# EAGLE board Arduino 40hz audio and led (EAGLE 9.2.2)
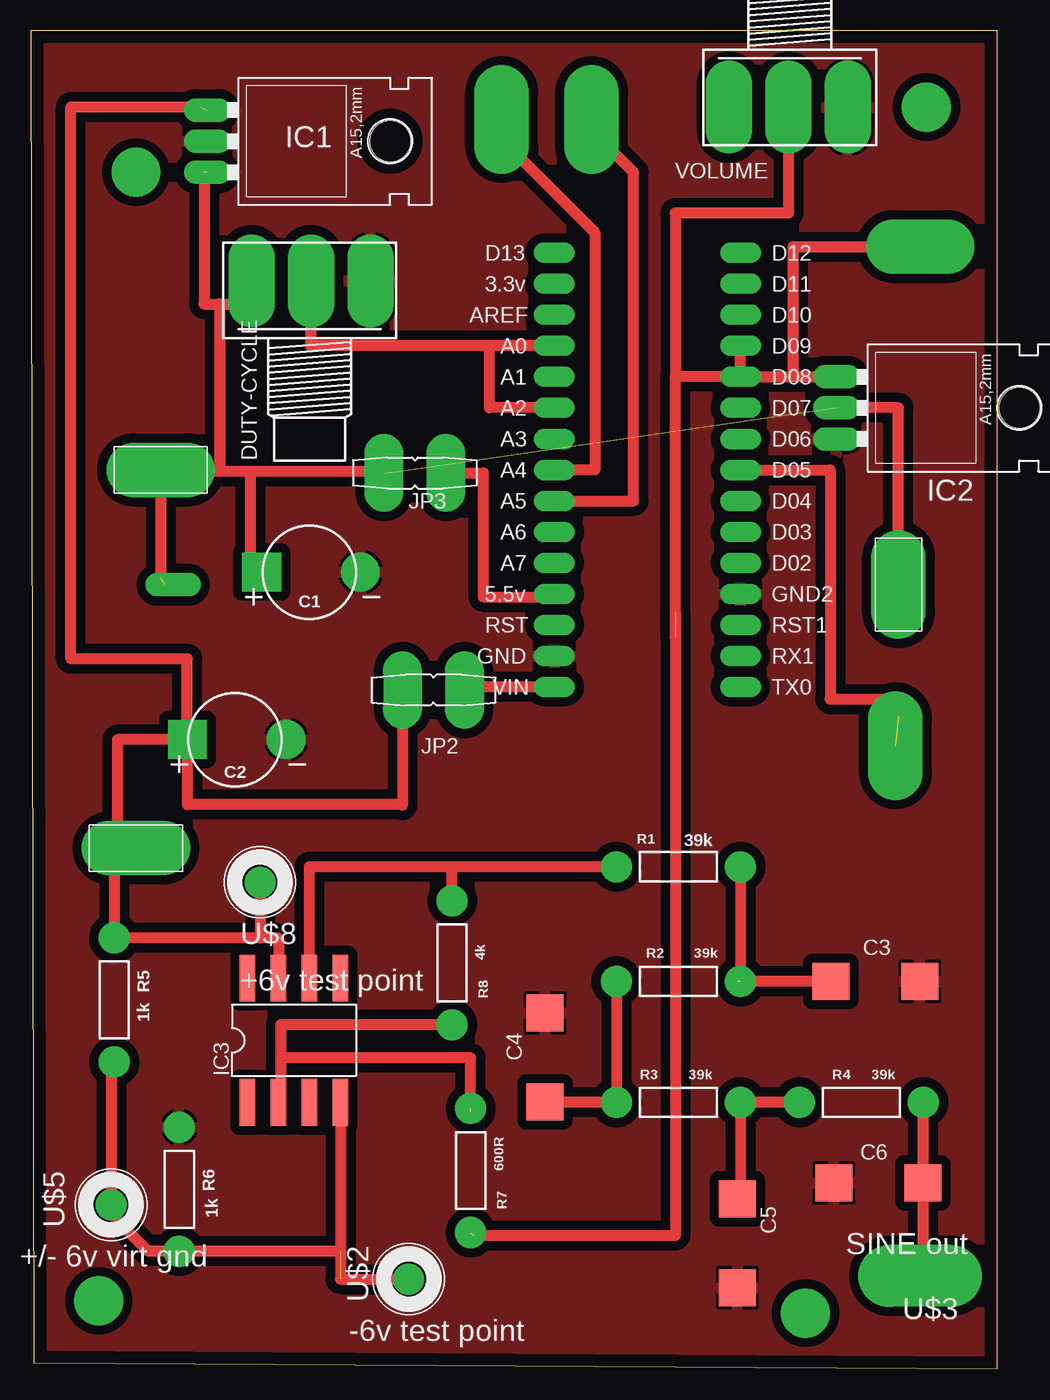
[diagram p0: board, top side]

Size 79.23 x 109.65 mm. Coordinates in mm from the lower left corner, seen from the top.
Outline: 0.25,0.51 79.23,0 79.23,109.65 0,109.65 0.25,0.51
Copper layers (1*16): Top 0.035mm / dielectric 1.5mm / Bottom 0.035mm
Design rules "default": minimum track width 6mil, minimum drill 0.35mm, track to track 6mil, track to pad 6mil, pad to pad 6mil, via to via 6mil, smd to smd 6mil, copper to edge 40mil, drill to drill 6mil, minimum pad ring 10mil, minimum via ring 8mil, stop-mask expansion 4mil, vias tented up to drill 0mil, thermal gap 10mil
Net classes: 0 default: width 0.914 mm, clearance 0.762 mm; 1 Thin20: width 0.508 mm, clearance 0.508 mm; 2 Medium25: width 0.635 mm, clearance 0.635 mm; 3 Medium30: width 0.762 mm, clearance 0.762 mm; 4 Large50: width 1.27 mm, clearance 0.762 mm; 5 Large100: width 2.54 mm, clearance 0.762 mm

## Footprints (pad centres in the part's own frame; a part is rotated, then mirrored left to right if it is on the bottom)
CAP-POLARIZED = drill 0 pad 3.175 square: 1 3.917,0 | drill 0 pad 3.175: 2 -4.171,0
CAP-MEDIUM-MUPPET = smd 3.048 x 3.048: 1 -4.279,0; 2 3.009,0
POTENTIOMETER = drill 0 pad 3.81 offset: 1 -4.746,-0.889; 2 0.127,-0.889; 3 5,-0.889
78XXL = drill 0 pad 1.93 long: GND 0,-3.81; IN -2.54,-3.81; OUT 2.54,-3.81 | hole 3.302: 0,11.176
DIL08 = smd 1.27 x 3.81: 1 -3.81,-5.08; 2 -1.27,-5.08; 3 1.27,-5.08; 4 3.81,-5.08; 5 3.81,5.08; 6 1.27,5.08; 7 -1.27,5.08; 8 -3.81,5.08
JP1 = drill 0 pad 3.175 long: 1 0,-2.54; 2 0,2.54
POWER-IN-PAD = drill 0 pad 4.445 long: VCC 0,0
AXIAL-0.4 = drill 0 pad 2.54: P$1 -5.08,0; P$2 5.08,0
ARDUINO-NANO = drill 0 pad 1.676 long: 3.3V -10.16,24.13; 5V -10.16,-1.27; A0 -10.16,19.05; A1 -10.16,16.51; A2 -10.16,13.97; A3 -10.16,11.43; A4 -10.16,8.89; A5 -10.16,6.35; A6 -10.16,3.81; A7 -10.16,1.27; AREF -10.16,21.59; D2 5.08,1.27; D3 5.08,3.81; D4 5.08,6.35; D5 5.08,8.89; D6 5.08,11.43; D7 5.08,13.97; D8 5.08,16.51; D9 5.08,19.05; D10 5.08,21.59; D11 5.08,24.13; D12 5.08,26.67; D13 -10.16,26.67; GND -10.16,-6.35; GND1 5.08,-1.27; RAW -10.16,-8.89; RST -10.16,-3.81; RST1 5.08,-3.81; RX1 5.08,-6.35; TX0 5.08,-8.89
PROBE_POINT_1 = drill 0 pad 2.54: P$1 -3.81,2.54
PAD-RECTANGLE-200MIL = drill 0 pad 5.08 long: PAD$1 0,0
PAD-RECTANGLE-175MIL = drill 0 pad 4.445 long: PAD$1 0,0
PAD-2PIN-RECTANGLE-50MIL = drill 0 pad 1.93 offset: PAD$1 -0.635,0; PAD$2 0.635,0
DRILL-HOLE-4MM = drill 0.01 pad 4: DRILL$1 0,0

## Placement (x,y rotation side)
C1  10uF  [CAP-POLARIZED]  22.86,65.28 180 top
C2  100uF  [CAP-POLARIZED]  16.76,51.56 180 top
C3  100nF  [CAP-MEDIUM-MUPPET]  69.85,31.75 0 top
C4  100nF  [CAP-MEDIUM-MUPPET]  42.16,26.16 90 top
C5  100nF  [CAP-MEDIUM-MUPPET]  57.91,9.65 270 top
C6  100nF  [CAP-MEDIUM-MUPPET]  68.83,15.24 180 top
DUTY-CYCLE  10K  [POTENTIOMETER]  22.86,88.14 0 top
IC1  LM7805  [78XXL]  18.29,100.58 270 top
IC2  IRL-Z44N  [78XXL]  69.85,78.74 270 top
IC3  LM741  [DIL08]  21.59,26.92 0 top
JP2  [JP1]  33.02,55.63 270 top
JP3  [JP1]  31.5,73.41 90 top
P+1  +12V  [POWER-IN-PAD]  8.64,42.67 180 top
P+2  +5V  [POWER-IN-PAD]  10.67,73.66 0 top
P+3  +6V  [POWER-IN-PAD]  71.12,64.26 90 top
R1  39k  [AXIAL-0.4]  53.09,41.15 180 top
R2  39k  [AXIAL-0.4]  53.09,31.75 0 top
R3  39k  [AXIAL-0.4]  53.09,21.84 180 top
R4  39k  [AXIAL-0.4]  68.07,21.84 180 top
R5  1k  [AXIAL-0.4]  6.86,30.23 90 top
R6  1k  [AXIAL-0.4]  12.19,14.73 270 top
R7  600R  [AXIAL-0.4]  36.07,16.26 270 top
R8  4k  [AXIAL-0.4]  34.54,33.27 270 top
U$1  ARDUINO-NANO  [ARDUINO-NANO]  53.09,64.77 0 top
U$2  -6v test point  [PROBE_POINT_1]  34.8,4.83 0 top
U$3  SINE out  [PAD-RECTANGLE-200MIL]  72.9,7.62 180 top
U$4  SCL  [PAD-RECTANGLE-175MIL]  38.61,102.36 90 top
U$5  +/- 6v virt gnd  [PROBE_POINT_1]  10.41,10.92 0 top
U$6  PAD-1PIN-RECTANGLE175  [PAD-RECTANGLE-175MIL]  45.97,102.36 90 top
U$7  PAD-2PIN-RECTANGLE  [PAD-2PIN-RECTANGLE-50MIL]  11.68,64.26 0 top
U$8  +6v test point  [PROBE_POINT_1]  22.61,37.34 0 top
U$9  PAD-1PIN-RECTANGLE175  [PAD-RECTANGLE-175MIL]  70.87,51.05 90 top
U$10  DRILL-HOLE-4MM  [DRILL-HOLE-4MM]  5.59,5.59 0 top
U$11  DRILL-HOLE-4MM  [DRILL-HOLE-4MM]  63.5,4.57 0 top
U$12  DRILL-HOLE-4MM  [DRILL-HOLE-4MM]  73.41,103.38 0 top
U$13  DRILL-HOLE-4MM  [DRILL-HOLE-4MM]  8.64,98.04 0 top
U$14  PAD-1PIN-RECTANGLE175  [PAD-RECTANGLE-175MIL]  72.9,91.95 0 top
VOLUME  100k  [POTENTIOMETER]  62.23,104.39 180 top

## Library data of the parts
C1 C2 = jim_muppet_parts; PROD_ID: CAP-08439
C3-C6 = jim_muppet_parts; PROD_ID: JIM-CAP Large SMT
DUTY-CYCLE IC1-IC3 JP2 JP3 P+1-P+3 R1-R8 U$1-U$3 U$5 U$7-U$14 VOLUME = jim_muppet_parts
U$4 = jim_muppet_parts; SDA: SDA
U$6 = jim_muppet_parts; SCL: SCL

## Nets
+5V: C1.1 DUTY-CYCLE.1 IC1.OUT IC2.GND JP3.2 P+2.VCC P+3.VCC U$7.PAD$1
+12V: C2.1 IC1.IN IC3.7 JP2.1 P+1.VCC R5.P$2 U$8.P$1
GND: C1.2 C2.2 C3.2 C4.2 C5.2 C6.2 DUTY-CYCLE.3 IC1.GND IC2.OUT R6.P$1 U$1.GND U$1.GND1 VOLUME.1
N$1: DUTY-CYCLE.2 U$1.A0 U$1.A2
N$2: IC2.IN R7.P$2 U$1.D8 U$1.D9 U$14.PAD$1 VOLUME.2
N$3: C3.1 R1.P$1 R2.P$2
N$4: C4.1 R2.P$1 R3.P$2
N$5: C5.1 R3.P$1 R4.P$2
N$6: C6.1 R4.P$1
N$8: JP2.2 U$1.RAW
N$9: JP3.1 U$1.5V
N$10: IC3.2 R7.P$1 R8.P$2
N$11: U$1.D5 U$9.PAD$1
N$12: IC3.4 R5.P$1 R6.P$2 U$2.P$1 U$5.P$1
N$13: IC3.6 R1.P$2 R8.P$1
N$14: U$1.A4
N$15: U$1.A5

## Tracks (layer width: path | path; a pad name or v marks a point on that pad's centre or on a via)
+5V  (4 unrouted)
  Top 0.914: 10.67,73.55 P+2.VCC | P+2.VCC 10.67,64.75 | 14.22,98.04 14.22,87.25 15.49,87.25 | 15.49,87.25 15.49,73.53 | 15.49,87.25 DUTY-CYCLE.1 | 15.49,73.53 10.67,73.53 P+2.VCC | 30.05,73.53 18.03,73.53 | 18.03,73.53 15.49,73.53 | C1.1 18.03,65.28 18.03,73.53 | P+3.VCC 71.12,78.74 IC2.GND
+12V  (1 unrouted)
  Top 0.914: C2.1 7.11,51.56 7.11,42.67 P+1.VCC 6.86,40.89 R5.P$2 18.8,35.31 | 13.97,103.38 3.3,103.38 3.3,58.17 12.85,58.17 C2.1 | 18.8,35.31 20.32,35.31 IC3.7 | U$8.P$1 18.8,35.31 | C2.1 12.85,46.23 30.45,46.23 30.48,46.2 JP2.1
GND
  pour Top: 0.25,0.51 0.25,109.73 79.76,109.73 79.76,0.51
N$1
  Top 0.914: U$1.A0 37.59,83.82 | 37.59,83.82 22.99,83.82 DUTY-CYCLE.2 | 37.59,83.82 37.59,78.74 U$1.A2
N$2  (2 unrouted)
  Top 0.914: U$1.D8 U$1.D9 | 52.83,59.94 52.83,81.28 | 52.83,81.28 52.83,94.7 62.1,94.7 VOLUME.2 | 52.83,61.98 52.83,10.92 36.32,10.92 | U$1.D8 62.48,81.28 | 62.48,81.28 IC2.IN | U$1.D8 52.83,81.28 | 62.48,81.28 62.48,91.95 U$14.PAD$1
N$3  (1 unrouted)
  Top 0.914: C3.1 57.91,31.75 | R1.P$1 R2.P$2
N$4
  Top 0.914: C4.1 42.16,21.84 R3.P$2 R2.P$1
N$5
  Top 0.914: R4.P$2 R3.P$1 58.17,14.18 C5.1
N$6
  Top 0.914: R4.P$1 73.11,21.8 C6.1 73.11,7.28 73.28,7.11
N$8
  Top 0.914: U$1.RAW 34.54,55.88 JP2.2
N$9
  Top 0.914: JP3.1 37.08,73.41 37.08,63.25 42.93,63.25 U$1.5V
N$10  (1 unrouted)
  Top 0.914: 20.5,25.48 20.5,22.02 IC3.2 | 20.5,25.48 36.07,25.48 36.07,21.08 | R8.P$2 20.5,28.19 20.5,25.48
N$11  (1 unrouted)
  Top 0.914: U$1.D5 65.53,73.66 65.53,54.86 69.72,54.86 71.12,53.47
N$12  (1 unrouted)
  Top 0.914: 25.4,9.65 R6.P$2 9.65,9.65 6.6,12.7 U$5.P$1 6.6,24.89 R5.P$1 | U$2.P$1 25.4,7.37 IC3.4
N$13
  Top 0.914: IC3.6 22.86,41.15 34.54,41.15 | R1.P$2 34.54,41.15 | R8.P$1 34.54,41.15
N$14
  Top 0.914: 37.47,101.85 46.23,93.09 46.23,73.66 U$1.A4
N$15
  Top 0.914: 45.97,101.47 49.4,98.04 49.4,71.12 U$1.A5